# Altium PCB ARDUINO MEGA 2560 MINI 2_2020-10-16_20-42-19.pcbdoc
Units mm, origin at the board's own origin, x right, y up, seen from the top; angles counter-clockwise.
Board outline 89.12 x 89.88 mm, 2 copper layers (Top Layer, Bottom Layer); 1 components, 0 nets, 82 pads, 0 vias.
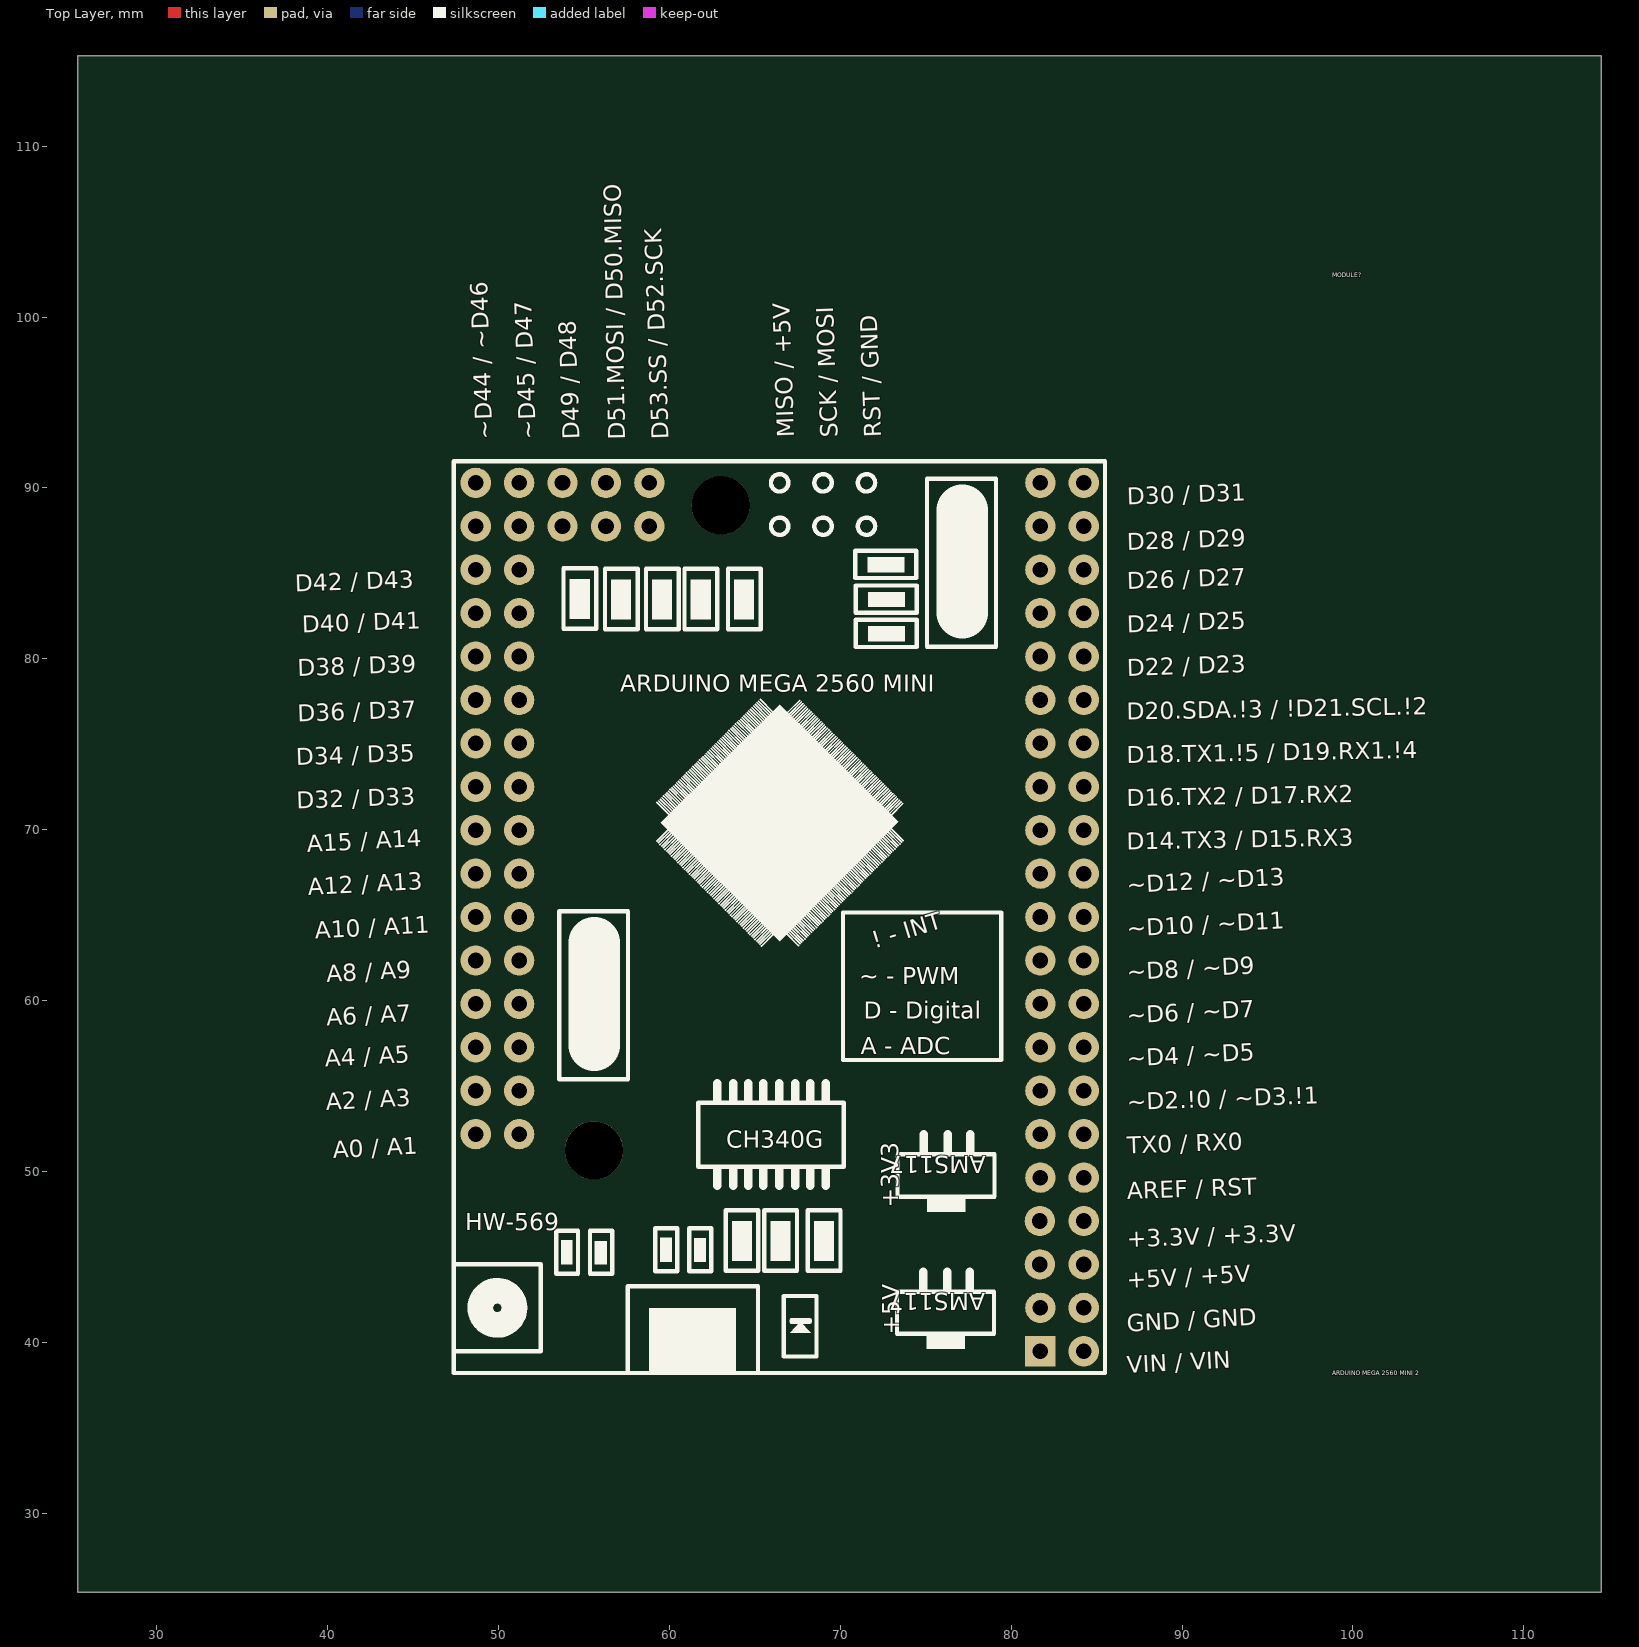
[diagram p0: Top Layer view]
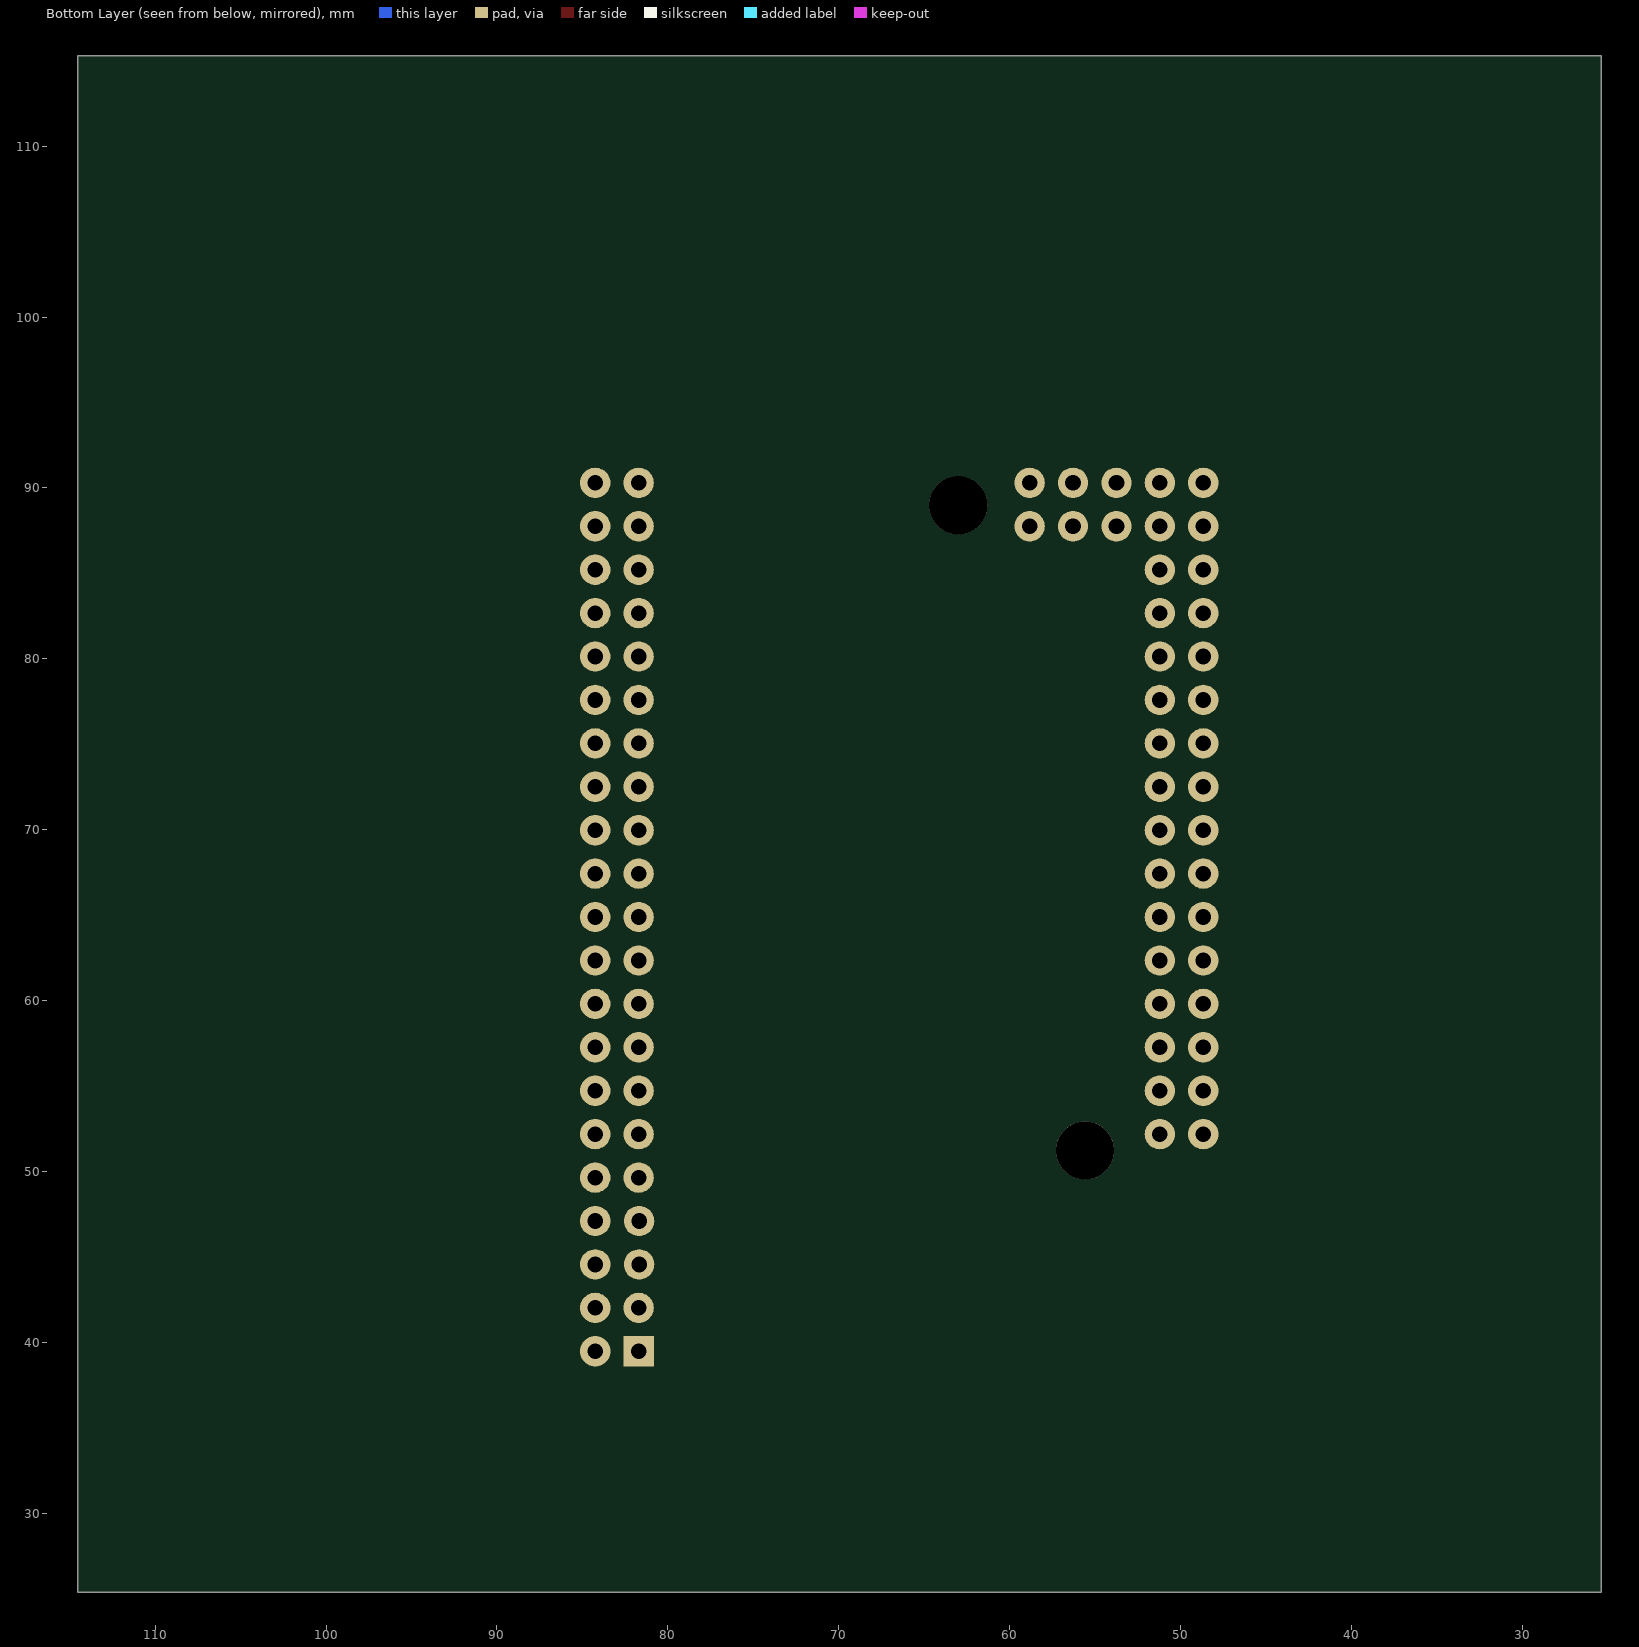
[diagram p1: Bottom Layer view, seen from below]

## Layer stack, top to bottom
Top Layer: signal copper (thickness not stored)
Dielectric: dielectric 0.32, FR-4, Dk 4.8
Bottom Layer: signal copper (thickness not stored)

## Board outline
114.523,25.4 25.4,25.4 25.4,115.284 114.523,115.284

## Components (designator, comment, footprint, x,y, rotation, side; value= is the part's Value field where it differs from the comment)
MODULE? "ARDUINO MEGA 2560 MINI 2" "ARDUINO MEGA 2560 MINI 2" 68.438,70.215 r0 top

## Footprints (in the part's own frame and the unit in brackets; to place one, negate y for a bottom-side part, rotate by r counter-clockwise, add the part's x,y. Pads: shape width x height; smd on the part's side, far side on the other; paste and mask are expansions set on the pad)
"ARDUINO MEGA 2560 MINI 2" [mil]
  rect 70x70 hole 36: 1(522.6,-1209.37)
  round 70 hole 36: 2(622.6,-1209.37) 3(522.6,-1109.37) 4(622.6,-1109.37) 5(521.6,-1009.37) 6(622.6,-1009.37) 7(522.66,-809.29) 8(622.66,-809.29) 9(522.66,-709.29) 10(622.66,-709.29) 11(522.66,-609.29) 12(622.66,-609.29) 13(522.66,-509.29) 14(622.66,-509.29) 15(522.66,-409.29) 16(622.66,-409.29) 17(522.66,-309.29) 18(622.66,-309.29) 19(522.66,-209.29) 20(622.66,-209.29) 21(522.66,-109.29) 22(622.66,-109.29) 23(522.66,-9.29) 24(622.66,-9.29) 25(522.66,90.71) 26(622.66,90.71) 27(522.66,190.71) 28(622.66,190.71) 29(522.66,290.71) 30(622.66,290.71) 31(522.66,390.71) 32(622.66,390.71) 33(522.66,490.71) 34(622.66,490.71) 35(522.66,590.71) 36(622.66,590.71) 37(522.66,690.71) 38(622.66,690.71) 39(522.66,790.71) 40(622.66,790.71) 41(-777.84,90.71) 42(-677.84,90.71) 43(-777.84,190.71) 44(-677.84,190.71) 45(-777.84,290.71) 46(-677.84,290.71) 47(-777.84,390.71) 48(-677.84,390.71) 49(-777.84,490.71) 50(-677.84,490.71) 51(-777.84,590.71) 52(-677.84,590.71) 53(-777.84,690.71) 54(-677.84,690.71) 55(-777.84,790.71) 56(-677.84,790.71) 57(-577.84,790.71) 58(-577.84,690.71) 59(-477.84,790.71) 60(-477.84,690.71) 61(-377.84,790.71) 62(-377.84,690.71) 63(-777.84,-709.29) 64(-677.84,-709.29) 65(-777.84,-609.29) 66(-677.84,-609.29) 67(-777.84,-509.29) 68(-677.84,-509.29) 69(-777.84,-409.29) 70(-677.84,-409.29) 71(-777.84,-309.29) 72(-677.84,-309.29) 73(-777.84,-209.29) 74(-677.84,-209.29) 75(-777.84,-109.29) 76(-677.84,-109.29) 77(-777.84,-9.29) 78(-677.84,-9.29) 90(521.6,-909.37) 91(622.6,-909.37)
  round 133.86 hole 133.86 unplated: ""(-505.47,-746.74) ""(-213.35,739.08)
  silkscreen extent -828,-1260 672,841

## Nets (pads, with @x,y where several pads share a name; then routed paths per layer and width w, separated by ;. In a path a pad name is that pad's centre, name@x,y a point inside that pad or via, vN(x,y) a via of type N, cw(c..) or ccw(c..) an arc to the next point about the centre after c; other vN are vias at no path point)
pads on no net: MODULE?. MODULE?.1 MODULE?.2 MODULE?.3 MODULE?.4 MODULE?.5 MODULE?.6 MODULE?.7 MODULE?.8 MODULE?.9 MODULE?.10 MODULE?.11 MODULE?.12 MODULE?.13 MODULE?.14 MODULE?.15 MODULE?.16 MODULE?.17 MODULE?.18 MODULE?.19 MODULE?.20 MODULE?.21 MODULE?.22 MODULE?.23 MODULE?.24 MODULE?.25 MODULE?.26 MODULE?.27 MODULE?.28 MODULE?.29 MODULE?.30 MODULE?.31 MODULE?.32 MODULE?.33 MODULE?.34 MODULE?.35 MODULE?.36 MODULE?.37 MODULE?.38 MODULE?.39 MODULE?.40 MODULE?.41 MODULE?.42 MODULE?.43 MODULE?.44 MODULE?.45 MODULE?.46 MODULE?.47 MODULE?.48 MODULE?.49 MODULE?.50 MODULE?.51 MODULE?.52 MODULE?.53 MODULE?.54 MODULE?.55 MODULE?.56 MODULE?.57 MODULE?.58 MODULE?.59 MODULE?.60 MODULE?.61 MODULE?.62 MODULE?.63 MODULE?.64 MODULE?.65 MODULE?.66 MODULE?.67 MODULE?.68 MODULE?.69 MODULE?.70 MODULE?.71 MODULE?.72 MODULE?.73 MODULE?.74 MODULE?.75 MODULE?.76 MODULE?.77 MODULE?.78 MODULE?.90 MODULE?.91

## Silkscreen, mask and mechanical layers (free items; w line width, h text height)
Document:
  lines w0.003: 69.936,70.317 69.987,70.367

## Text inside footprints (layer, text, board x,y; h text height)
MODULE?: Top Overlay "VIN / VIN" at 86.796,38.221 h1 r3; Top Overlay "GND / GND" at 86.796,40.634 h1 r3; Top Overlay "+5V / +5V" at 86.796,43.174 h1 r3; Top Overlay "AREF / RST" at 86.786,48.381 h1 r2; Top Overlay "+3.3V / +3.3V" at 86.787,45.587 h1 r2; Top Overlay "ARDUINO MEGA 2560 MINI" at 57.124,78.083 h1; Top Overlay "TX0 / RX0" at 86.787,51.048 h1 r2; Top Overlay "~D2.!0 / ~D3.!1" at 86.787,53.588 h1 r2; Top Overlay "~D4 / ~D5" at 86.795,56.128 h1 r3; Top Overlay "~D6 / ~D7" at 86.795,58.668 h1 r3; Top Overlay "~D8 / ~D9" at 86.795,61.208 h1 r3; Top Overlay "~D10 / ~D11" at 86.795,63.748 h1 r3; Top Overlay "~D12 / ~D13" at 86.795,66.288 h1 r3; Top Overlay "D14.TX3 / D15.RX3" at 86.777,68.828 h1 r1; Top Overlay "D16.TX2 / D17.RX2" at 86.777,71.368 h1 r1; Top Overlay "D18.TX1.!5 / D19.RX1.!4" at 86.777,73.908 h1 r1; Top Overlay "D20.SDA.!3 / !D21.SCL.!2" at 86.777,76.448 h1 r1; Top Overlay "D22 / D23" at 86.786,78.988 h1 r2; Top Overlay "D24 / D25" at 86.786,81.528 h1 r2; Top Overlay "D26 / D27" at 86.786,84.068 h1 r2; Top Overlay "D28 / D29" at 86.786,86.354 h1 r2; Top Overlay "D30 / D31" at 86.787,89.021 h1 r2; Top Overlay "A0 / A1" at 40.336,50.794 h1 r3; Top Overlay "A2 / A3" at 39.927,53.588 h1 r3; Top Overlay "A4 / A5" at 39.881,56.128 h1 r3; Top Overlay "A6 / A7" at 39.972,58.541 h1 r3; Top Overlay "A8 / A9" at 39.972,61.081 h1 r3; Top Overlay "A10 / A11" at 39.282,63.621 h1 r3; Top Overlay "A12 / A13" at 38.873,66.161 h1 r3; Top Overlay "A15 / A14" at 38.825,68.701 h1 r3; Top Overlay "D32 / D33" at 38.226,71.241 h1 r2; Top Overlay "D34 / D35" at 38.181,73.781 h1 r2; Top Overlay "D36 / D37" at 38.272,76.321 h1 r2; Top Overlay "D38 / D39" at 38.272,78.988 h1 r2; Top Overlay "D40 / D41" at 38.544,81.528 h1 r2; Top Overlay "D42 / D43" at 38.135,83.941 h1 r2; Top Overlay "MISO / +5V" at 67.329,92.967 h1 r92; Top Overlay "SCK / MOSI" at 69.869,92.967 h1 r92; Top Overlay "RST / GND" at 72.409,92.967 h1 r92; Top Overlay "~D44 / ~D46" at 49.676,92.84 h1 r92; Top Overlay "~D45 / D47" at 52.216,92.84 h1 r92; Top Overlay "D49 / D48" at 54.756,92.84 h1 r92; Top Overlay "D51.MOSI / D50.MISO" at 57.424,92.831 h1 r91; Top Overlay "D53.SS / D52.SCK" at 59.963,92.84 h1 r92; Top Overlay "~ - PWM" at 71.119,60.979 h1; Top Overlay "A - ADC" at 71.194,56.859 h1; Top Overlay "D - Digital" at 71.379,58.949 h1; Top Overlay "! - INT" at 72.025,63.041 h1 r17; Top Overlay "CH340G" at 63.328,51.407 h1; Top Overlay "AMS117" at 78.509,50.908 h1 r180; Top Overlay "AMS117" at 78.479,42.878 h1 r180; Top Overlay "+5V" at 73.449,40.465 h1 r90; Top Overlay "+3V3" at 73.399,47.893 h1 r90; Top Overlay "HW-569" at 48.069,46.583 h1